# Altium PCB radioslave.PcbDoc
Units mm, origin at the board's own origin, x right, y up, seen from the top; angles counter-clockwise.
Board outline 45 x 100 mm, 2 copper layers (Top Layer, Bottom Layer); 45 components, 40 nets, 153 pads, 25 vias.
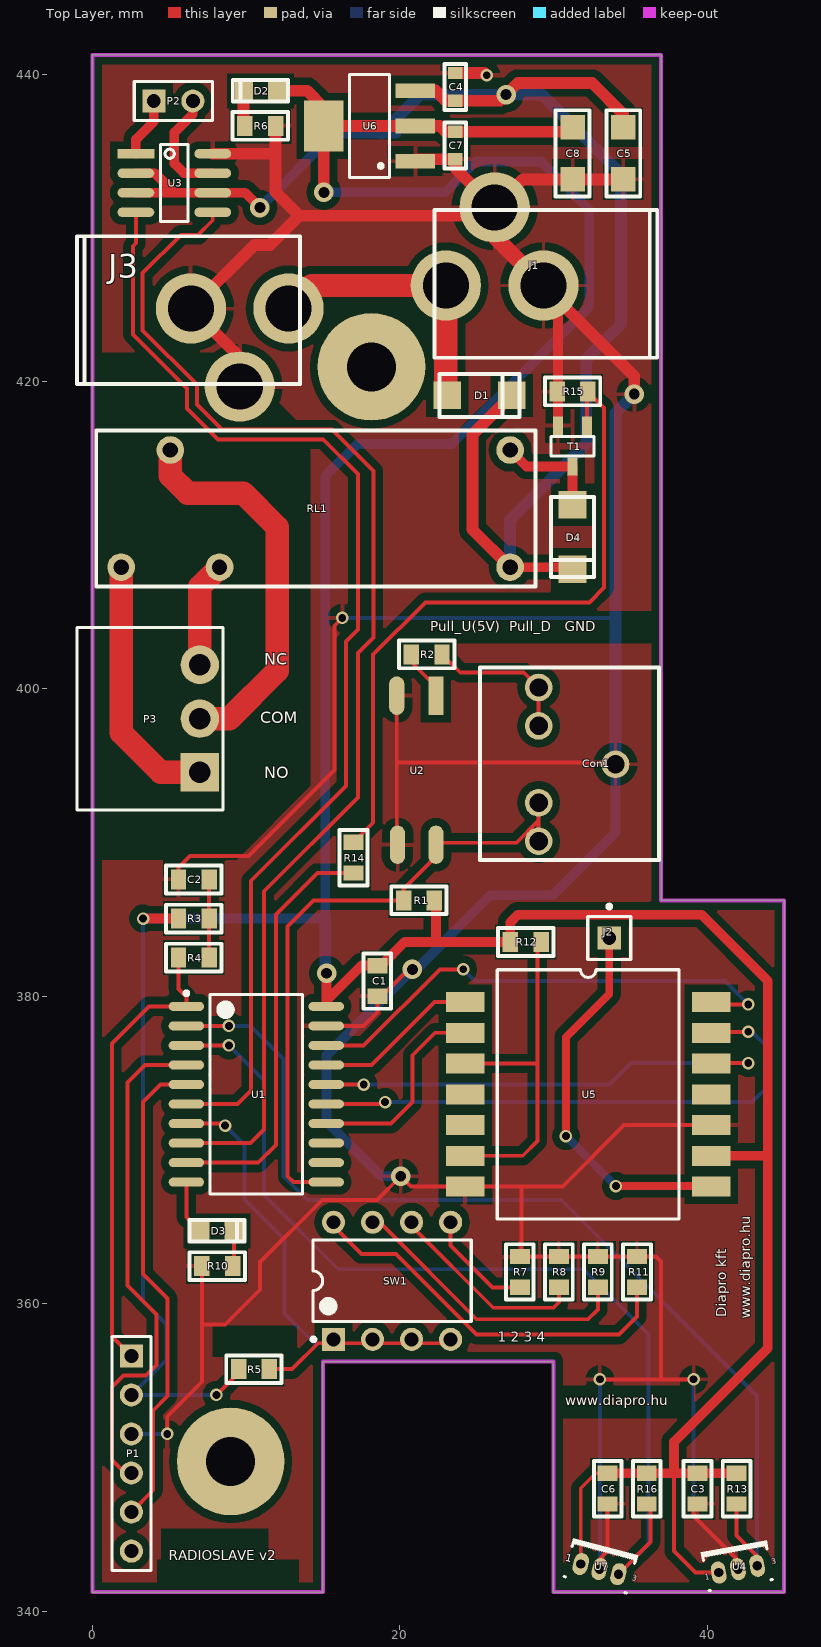
[diagram p0: Top Layer view]
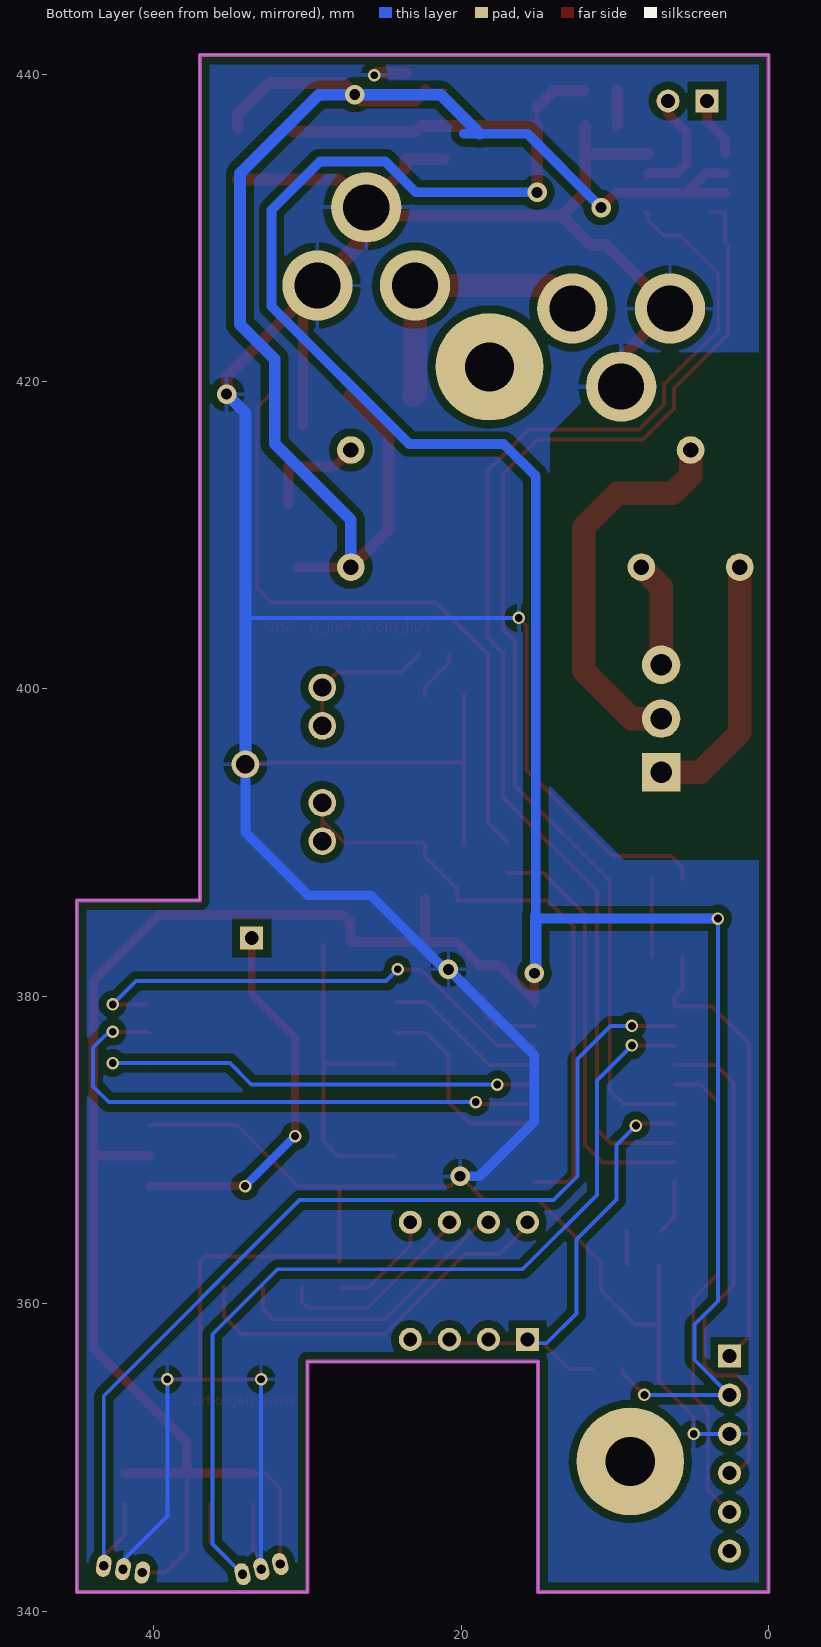
[diagram p1: Bottom Layer view, seen from below]
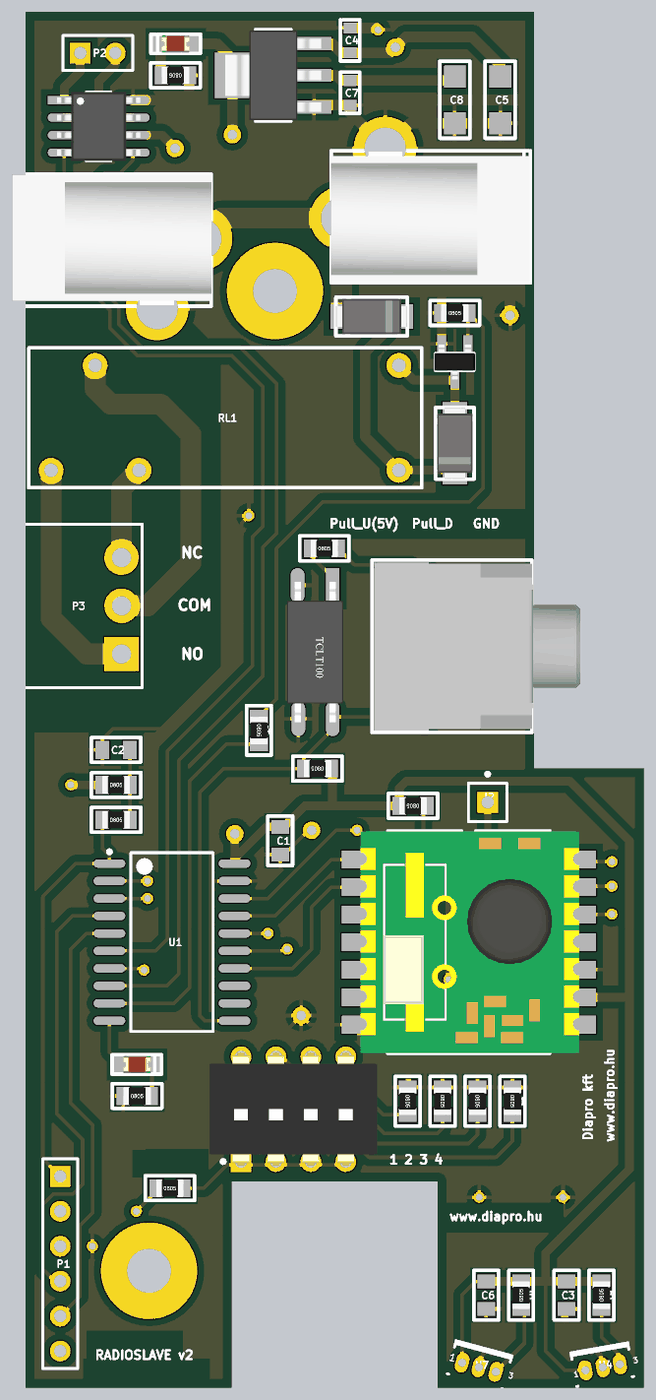
[diagram p2: 3D render of the assembled board from above, using the file's embedded part models]

## Layer stack, top to bottom
Top Layer: signal copper 0.0356
Dielectric: dielectric 0.32, FR-4, Dk 4.8
Bottom Layer: signal copper 0.0356

## Board outline
0,341.249 0,441.249 37,441.249 37,386.249 45,386.249 45,341.249 30,341.249 30,356.249 15,356.249 15,341.249

## Design rules (kind name [scope] priority, off if disabled: settings)
Clearance Clearance_to_polygon [All vs (InNamedPolygon('Bottom GND'))  or (InNamedPolygon('Top GND'))] p1: gap=0.508
Clearance [All] p2: gap=0.381
PolygonConnect [All] p1: connectstyle=Relief reliefconductorwidth=0.254 reliefentries=4 polygonreliefangle="90 Angle"
RoutingVias [All] p1: holewidth=0.508 width=0.813 viastyle="Through Hole" minholewidth=0.508 minwidth=0.813 maxholewidth=0.711 maxwidth=1.27
SilkToSilkClearance [All] p1: silktosilkclearance=0
SilkscreenOverComponentPads [All] p1: minsilkscreentomaskgap=0
SolderMaskExpansion [All] p1: expansion=0.102
Width [All] p1: maxlimit=1.524 minlimit=0.254 preferedwidth=0.254
26 further rules are at their usual default settings.

## Components (designator, comment, footprint, x,y, rotation, side; value= is the part's Value field where it differs from the comment)
C1 "100nF" FP_0805_CAP_060 18.542,381 r90 top
C2 "100nF" FP_0805_CAP_060 6.604,387.604 r0 top
C3 "100nF" FP_0805_CAP_060 39.37,347.98 r90 top
C4 "100nF" FP_0603_CAP_080 23.622,439.166 r270 top
C5 "10uF" FP_1206_CAP_085 34.544,434.848 r270 top
C6 "100nF" FP_0805_CAP_060 33.528,347.98 r90 top
C7 "100nF" FP_0603_CAP_080 23.622,435.356 r270 top
C8 "10uF" FP_1206_CAP_085 31.242,434.848 r90 top
Con1 "Stereo_Jack" STEREO_JACK 34.036,395.097 r180 top
D1 "DIODE_big" "FP_SMA DO214AC" 23.089,419.1 r0 top
D2 "LED_RED" FP_0805_LED_RED 11.938,438.912 r180 top
D3 "LED_GREEN" FP_0805_LED_RED 7.112,364.744 r0 top
D4 "DIODE_big" "FP_SMA DO214AC" 31.242,411.988 r270 top
J1 "2.xmm" FP_DC_TAP_ANYA 23,426.249 r270 top
J2 "ANT" PIN1 33.63,383.794 r0 top
J3 "2.xmm" FP_DC_TAP_ANYA 12.767,424.75 r90 top
P1 "Header 6" HDR1X6 2.54,356.616 r270 top
P2 "Header 2" HDR1X2 4,438.249 r0 top
P3 "Header 3" "SORKAPOCS 3 P RM3.81" 6.997,401.574 r270 top
R1 "10k" FP_0805_RES 21.25,386.249 r180 top
R2 "470R" FP_0805_RES 21.75,402.249 r0 top
R3 "10K" FP_0805_RES 6.604,385.064 r0 top
R4 "100R" FP_0805_RES 6.604,382.524 r0 top
R5 "10k" FP_0805_RES 10.516,355.752 r0 top
R6 "270R" FP_0805_RES 10.922,436.626 r180 top
R7 "10k" FP_0805_RES 27.813,362.077 r270 top
R8 "10k" FP_0805_RES 30.353,362.077 r270 top
R9 "10k" FP_0805_RES 32.893,362.077 r270 top
R10 "270R" FP_0805_RES 8.128,362.458 r0 top
R11 "10k" FP_0805_RES 35.433,362.077 r270 top
R12 "10k" FP_0805_RES 28.194,383.54 r180 top
R13 "820R" FP_0805_RES 41.91,347.98 r90 top
R14 "470R" FP_0805_RES 16.993,389.026 r270 top
R15 "10k" FP_0805_RES 31.242,419.354 r0 top
R16 "820R" FP_0805_RES 36.068,347.98 r90 top
RL1 "S7001E12W" RELAY_MORSE 27.178,415.544 r180 top
SW1 "DIPSW4" "DIP switch 4 TH" 19.5,361.499 r90 top
T1 "Si2306" FET_SOT23 31.242,415.798 r90 top
U1 "PIC24F16KA101-I/SO" SOIC-SO20_N 10.668,373.634 r0 top
U2 "KB817D-B" SOP-4L 21.082,394.716 r270 top
U3 "BD6221" DIGITAL_SOIC8 5.334,432.918 r0 top
U4 "A3122EUA" "Allegro_hall sensor" 42,342.741 r10 top
U5 "RFM12B" RFM12B-S1 32.258,373.634 r0 top
U6 "LD1117xx" SUPPLY_SOT223 18.034,436.626 r180 top
U7 "A3122EUA" "Allegro_hall sensor" 33,342.741 r345 top

## Footprints (in the part's own frame and the unit in brackets; to place one, negate y for a bottom-side part, rotate by r counter-clockwise, add the part's x,y. Pads: shape width x height; smd on the part's side, far side on the other; paste and mask are expansions set on the pad)
"Allegro_hall sensor" [mm] "SIP; 3 Leads; Body 3 x 4 x 1.5 mm (typ); Pitch 1.27 mm"
  oval 0.95x1.45 hole 0.6: 1(-1.27,0) 2(0,0) 3(1.27,0)
  silkscreen extent -2.2,-1.05 2.2,1.53
DIGITAL_SOIC8 [mm]
  rect 2.4x0.6 smd: 1(-2.5,1.905)
  oval 2.4x0.6 smd: 2(-2.5,0.635) 3(-2.5,-0.635) 4(-2.5,-1.905) 5(2.5,-1.905) 6(2.5,-0.635) 7(2.5,0.635) 8(2.5,1.905)
  silkscreen extent -0.9,-2.5 0.9,2.5, body extent -3.03,-2.5 3.03,2.5, height 1.9
"DIP switch 4 TH" [mm]
  rect 1.5x1.5 hole 0.9: 1(-3.81,3.81)
  round 1.5 hole 0.9: 2(-3.81,1.27) 3(-3.81,-1.27) 4(-3.81,-3.81) 5(3.81,-3.81) 6(3.81,-1.27) 7(3.81,1.27) 8(3.81,3.81)
  silkscreen extent -3.93,-5.15 2.65,5.23, body extent -4.1,-6.1 4.1,6.1, height 5
FET_SOT23 [mm] "SOT23-3 tok"
  rect 1.2x0.65 smd: D(-1.327,0) G(1.327,-0.95) S(1.327,0.95)
  silkscreen extent -0.64,-1.4 0.64,1.4, body extent -1.27,-1.46 1.27,1.46, height 0.97
FP_0603_CAP_080 [mm] "0.8mm magas 0603 kapacitás"
  rect 0.8x0.95 smd: 1(-0.9,0) 2(0.9,0)
  silkscreen extent -1.5,-0.7 1.5,0.7, body extent -0.8,-0.4 0.76,0.4, height 0.8
FP_0805_CAP_060 [mm] "0805 kapacitás YAGEO 0.6 mm magas"
  rect 1x1.3 smd: 1(-1,0) 2(1,0)
  silkscreen extent -1.8,-0.9 1.8,0.9, body extent -1,-0.64 1.03,0.64, height 0.6
FP_0805_LED_RED [mm] "0805 méretû piros LED"
  rect 1.2x1.3 smd: A(-0.1,0) K(2.1,0)
  silkscreen extent -0.8,-0.7 2.8,0.7, body extent 0.01,-0.63 2.03,0.62, height 1.1
FP_0805_RES [mm] "0805 ellenállás"
  rect 1x1.3 smd: 1(-1,0) 2(1,0)
  silkscreen extent -1.8,-0.9 1.8,0.9, body extent -1,-0.62 1,0.63, height 0.62
FP_1206_CAP_085 [mm] "1206 kapacitás 0.85 mm"
  rect 1.6x1.6 smd: 1(-1.7,0) 2(1.7,0)
  silkscreen extent -2.8,-1.1 2.8,1.1, body extent -1.52,-0.79 1.58,0.79, height 0.85
FP_DC_TAP_ANYA [mil] "DC HEBA25 TÁPFESZÜLTSÉG ALJZAT ZÁRT, NYÁKBA 90°"
  round 180 hole 118: 1(0,0) 2(0,250) 3(-200,125)
  silkscreen extent -193,-30 185,541, body extent -190,-31 183,539, height 440
"FP_SMA DO214AC" [mm] "SMA DO-214AC tok"
  rect 1.8x1.8 smd: A(0,0) K(4.2,0)
  silkscreen extent -0.5,-1.4 4.7,1.4, body extent -0.5,-1.3 4.7,1.3, height 2.42
HDR1X2 [mm] "Connector; Header; 2 Position"
  rect 1.5x1.5 hole 0.9: 1(0,0)
  round 1.5 hole 0.9: 2(2.54,0)
  silkscreen extent -1.27,-1.27 3.81,1.27
HDR1X6 [mm] "Connector; Header; 6 Position"
  rect 1.5x1.5 hole 0.9: 1(0,0)
  round 1.5 hole 0.9: 2(2.54,0) 3(5.08,0) 4(7.62,0) 5(10.16,0) 6(12.7,0)
  silkscreen extent -1.27,-1.27 13.97,1.27
PIN1 [mm] "Connector; Plug"
  rect 1.5x1.5 hole 0.9: 1(0,0)
  silkscreen extent -1.4,-1.4 1.4,2.17
RELAY_MORSE [mm]
  round 1.8 hole 1: 1(0,7.62) 2(0,0) 3(18.9,7.62) 4(22.1,0) 5(25.3,7.62)
  silkscreen extent -1.65,-1.27 26.92,8.89, body extent -1.65,-1.27 26.92,8.89, height 12.5
RFM12B-S1 [mm]
  rect 2.5x1.3 smd: 1(-8,6) 2(-8,4) 3(-8,2) 4(-8,0) 5(-8,-2) 6(-8,-4) 7(-8,-6) 8(8,-6) 9(8,-4) 10(8,-2) 11(8,0) 12(8,2) 13(8,4) 14(8,6)
  silkscreen extent -5.91,-8.1 5.92,8.1, body extent -7.88,-8.05 8.04,8.05, height 2.1
SOIC-SO20_N [mm] "SOIC, 20-Leads, Body 12.8x7.5mm, Pitch 1.27mm, IPC Medium Density"
  oval 2.3x0.6 smd: 1(-4.55,5.715) 2(-4.55,4.445) 3(-4.55,3.175) 4(-4.55,1.905) 5(-4.55,0.635) 6(-4.55,-0.635) 7(-4.55,-1.905) 8(-4.55,-3.175) 9(-4.55,-4.445) 10(-4.55,-5.715) 11(4.55,-5.715) 12(4.55,-4.445) 13(4.55,-3.175) 14(4.55,-1.905) 15(4.55,-0.635) 16(4.55,0.635) 17(4.55,1.905) 18(4.55,3.175) 19(4.55,4.445) 20(4.55,5.715)
  silkscreen extent -4.67,-6.5 3,6.69, body extent -3.75,-6.5 3.75,6.5, height 2.65
SOP-4L [mm]
  rect 2.5x1 smd: 1(-4.85,1.275)
  oval 2.5x1 smd: 2(-4.85,-1.275) 3(4.85,-1.225) 4(4.85,1.275)
  body extent -5.1,-2.05 5.1,2.05, height 2.1
"SORKAPOCS 3 P RM3.81" [mm] "SORKAPOCS 3 P RM3.81 CSAPSORLÉC TLPHC100V-03P (TLM) ZÁRT 8A 150V VDE [43-22-68]"
  rect 2.5x2.5 hole 1.4: 1(7,0)
  round 2.5 hole 1.4 mask+0.102: 2(3.5,0) 3(0,0)
  silkscreen extent -2.44,-8 9.45,1.5, body extent -2.41,-8 9.45,1.5, height 7.2
STEREO_JACK [mm] "JACK 3.5mm ANYA 90° JS35-09 (T-T) LEVÁL. NYÁK SZTEREO 90° A-V [43-08-39]"
  round 1.8 hole 1.2: 1(0,0) 2(5,5) 2(5,2.5) 3(5,-2.5) 3(5,-5)
  silkscreen extent -2.82,-6.3 8.81,6.22, body extent -6.33,-6.13 8.67,6.07, height 11.5
SUPPLY_SOT223 [mm] "SOT223 package, 3 leads"
  rect 2.55x0.95 smd: 1(-2.975,2.3) 2(-2.975,0) 3(-2.975,-2.3)
  rect 2.55x3.3 smd: 2(2.975,0)
  silkscreen extent -1.3,-3.35 1.3,3.35, body extent -3.5,-3.25 3.5,3.25, height 1.65

## Part data
C1 C2 C3 C4 C5 C6 C7 C8: library part Cap, "Capacitor"
D2: library part LED_R, "Typical LED"
D3: library part LED_G, "Typical LED"
J1 J3: library part DC_TAP_ANYA, "2.xmm DC HEBA25 TÁPFESZÜLTSÉG ALJZAT ZÁRT, NYÁKBA 90°"
J2: library part Socket, "Socket"
P1: "Header, 6-Pin"
P2: "Header, 2-Pin"
P3: "Header, 3-Pin"
R1 R2 R3 R4 R5 R6 R7 R8 R9 R10 R11 R12 R13 R14 R15 R16: library part Res3, "Resistor"
RL1: library part RELAY_MORSE, "S7001E12W  12V morse 230AC/10A"
T1: library part NMOS
U1: "16-Bit Flash Microcontroller with nanoWatt XLP Technology, 16KB Flash, 1.5KB SRAM, 20-Pin SOIC, Industrial Temperature"
U2: "KB817D-B (KIN) SOP-4L OPTOCOUPLER TRANS-OUT 300-600% 5kV SOP-4L [84-00-48]"
U3: "H_bridge"
U4 U7: "Hall-Effect Switch for High-Temperature Operation"
U5: "FM Module"
U6: "LD1117xx 3,3V lin reg"

## Free pads (board coordinates)
  round 7 hole 3.2: 0(9,349.749) 0(18.161,420.954)

## Via types
v1: diameter 0.813, hole 0.508, Top Layer to Bottom Layer, 18 vias
v2: diameter 1.27, hole 0.711, Top Layer to Bottom Layer, 7 vias

## Nets (pads, with @x,y where several pads share a name; then routed paths per layer and width w, separated by ;. In a path a pad name is that pad's centre, name@x,y a point inside that pad or via, vN(x,y) a via of type N, cw(c..) or ccw(c..) an arc to the next point about the centre after c; other vN are vias at no path point)
AN0: R13.1 U1.2 U4.3 | length 67.2
  Top Layer w0.254: U1.2 v1(8.89,378.079) ; R13.1 41.91,344.932 43.251,343.591 U4.3
  Bottom Layer w0.254: v1(8.89,378.079) 10.287,378.079 12.446,375.92 12.446,368.3 13.997,366.749 30.507,366.749 43.251,354.005 U4.3
AN1: R16.1 U1.3 U7.3 | length 64.1
  Top Layer w0.254: U1.3 v1(8.89,376.809) ; U7.3 36.322,344.508 R16.1@36.322,346.98
  Bottom Layer w0.254: v1(8.89,376.809) 11.176,374.523 11.176,367.073 16,362.249 31.959,362.249 36.186,358.022 36.186,344.372 U7.3
AN2: R5.2 SW1.1 SW1.2 SW1.3 SW1.4 U1.7 | length 33.1
  Top Layer w0.254: U1.7 8.509,371.729 v1(8.636,371.602) ; R5.2 13.003,355.752 14.69,357.439 SW1.4@23.56,357.439
  Bottom Layer w0.254: v1(8.636,371.602) 9.906,370.332 9.906,366.776 12.5,364.182 12.5,359.379 14.44,357.439 SW1.1@15.69,357.439
AN2/PGD1: P1.4 U1.4 | length 33.3
  Top Layer w0.254: P1.4 2.134,348.996 1.282,349.848 1.282,354.597 2.019,355.334 3.476,355.334 4.166,356.023 4.166,359.308 2.286,361.188 2.286,374.396 3.429,375.539 U1.4
GND: C1.1 C2.1 C3.1 C4.1 C5.2 C6.1 C7.2 C8.1 Con1.1 J1.2 J1.3 J3.2 J3.3 P1.3 R6.1 R7.1 R8.1 R9.1 R10.1 R11.1 R15.1 T1.S U1.19 U2.2 U2.3 U3.8 U4.2 U5.7 U5.10 U6.1 U7.2 | length 339.1
  Top Layer w0.254: v1(4.877,351.536) 4.877,352.679 7.128,354.93 R10.1 ; C2.1 5.604,388.382 6.35,389.128 10.16,389.128 15.748,394.716 15.748,404.114 v1(16.256,404.622) ; 7.229,358.648 8.649,358.648 10.922,360.921 10.922,362.712 14.959,366.749 18.515,366.749 v2(20.066,368.3) 20.732,367.634 U5.7 30.601,367.634 34.601,371.634 U5.10 ; U1.19 17.653,378.079 18.542,378.968 C1.1 18.812,380 20.828,382.016 v2@20.828,382.27 ; U2.3@19.807,389.866 19.807,395.229 ; U2.2 19.807,395.229 ; v1@25.516,440.066 v1(25.654,439.928) ; J1.3@25.63,430.784 J1.3 J1.3@26.175,429.424 ; R7.1 R7.1@27.924,363.077 ; R7.1@27.924,362.712 R7.1@27.924,363.077 ; 27.924,367.618 R7.1@27.924,363.077 ; J1.2 J1.2@29.514,426.085 ; U7.2 33,343.388 33.528,343.916 C6.1 ; v1(33.02,355.092) 37,355.092 ; Con1.1 33.904,395.229 19.807,395.229 ; C3.1@39.116,346.98 39.116,346.202 42,343.318 U4.2 ; v1(39.116,355.092) 37,355.092 ; R7.1@27.924,363.077 R8.1 R9.1 R11.1 36.672,363.077 37,362.749 37,355.092
  Top Layer w0.635: T1.S J1.2@30.292,425.307
  Top Layer w0.762: U3.8 11.82,434.823 11.922,434.721 ; J3.3 9.592,421.575 J3.2 10.546,428.879 11.557,428.879 13.462,430.784 ; R6.1 11.922,434.721 ; U6.1@21.139,434.456 C7.2 23.622,433.882 J1.3 27.994,433.148 C5.2 ; C4.1 v1@25.516,440.066 ; J1.3@25.63,430.784 13.462,430.784 ; J1.2@29.514,426.085 30.292,425.307 35.255,420.344 v2(35.255,419.176) ; 11.922,434.721 11.922,432.324 13.462,430.784
  Top Layer w1.016: J1.3@26.175,429.424 J1.2
  Bottom Layer w0.254: P1.3 v1(4.877,351.536) ; v1(16.256,404.622) 33.833,404.622 ; v2@20.574,381.508 v2@20.828,381.508 ; J1.2@29.35,424.32 J1.2 ; U7.2 33,343.388 33.02,343.408 v1(33.02,355.092) ; v1(39.116,355.092) 39.116,346.202 42,343.318 U4.2
  Bottom Layer w0.635: v2(20.066,368.3) 18.796,368.3 15.24,371.856 15.24,376.174 v2@20.574,381.508 ; v2@20.828,381.508 25.908,386.588 29.972,386.588 34.036,390.652 Con1.1
  Bottom Layer w0.762: Con1.1 34.036,417.957 v2(35.255,419.176)
  other v2: 20.828,381.762
GPIO0: Con1.2 R1.2 U1.11 U2.4 | length 41.4
  Top Layer w0.254: U1.11 13.081,367.919 12.7,368.3 12.7,384.556 14.393,386.249 R1.2 20.25,386.999 22.357,389.106 U2.4 ; U2.4@22.357,389.999 27.592,389.999 29.036,391.443 Con1.2@29.036,392.597 ; Con1.2@29.036,390.097 29.036,391.347
GPIO1: R14.2 U1.9 | length 27.5
  Top Layer w0.254: U1.9 10.795,369.189 11.938,370.332 11.938,385.318 14.646,388.026 R14.2
GPIO2: D3.A U1.10 | length 3.5
  Top Layer w0.254: U1.10 6.118,365.638 D3.A
GPIO3: U1.6 U3.4 | length 75.7
  Top Layer w0.254: U3.4@3.81,431.013 U3.4 2.834,428.995 2.642,428.803 2.642,423.062 6.163,419.541 6.163,418.25 8.172,416.241 15.026,416.241 17.272,413.995 17.272,403.86 16.51,403.098 16.51,393.7 10.334,387.524 10.334,373.888 9.445,372.999 U1.6
GPIO4/PGC1: P1.5 U1.5 | length 31.6
  Top Layer w0.254: P1.5 3.962,347.878 3.962,353.06 4.902,354 4.902,360.35 3.302,361.95 3.302,373.126 4.445,374.269 U1.5
GPIO5: U1.8 U3.5 | length 81.2
  Top Layer w0.254: U1.8 10.287,370.459 11.176,371.348 11.176,386.842 17.272,392.938 17.272,402.336 18.288,403.352 18.288,414.172 15.584,416.876 8.435,416.876 6.798,418.513 6.798,419.804 3.277,423.325 3.277,427.05 5.766,429.539 6.883,429.539 7.834,430.49 U3.5 U3.5@8.077,431.013
IN: D1.A J1.1 J3.1 | length 18
  Top Layer w1.524: J3.1 14.266,426.249 J1.1 23,419.189 D1.A
M\C\L\R\: P1.1 R4.1 U1.1 | length 30.1
  Top Layer w0.254: P1.1 1.27,357.886 1.27,376.936 3.683,379.349 U1.1 6.118,379.962 5.604,380.476 R4.1
MISO: U1.17 U5.1 | length 10.7
  Top Layer w0.254: U1.17 18.161,375.539 22.256,379.634 U5.1
MOSI: U1.16 U5.12 | length 30.5
  Top Layer w0.254: U1.16 v1(17.653,374.269) ; U5.12 40.29,375.666 v1(42.672,375.666)
  Bottom Layer w0.254: v1(17.653,374.269) 33.655,374.269 35.052,375.666 v1(42.672,375.666)
NetC2_2: C2.2 R3.2 R4.2 | length 5.1
  Top Layer w0.254: R4.2 R3.2 C2.2
NetCon1_3: Con1.3 R2.2 | length 9.7
  Top Layer w0.254: R2.2 23.933,401.066 28.067,401.066 29.036,400.097 Con1.3@29.036,397.597
NetD2_K: D2.K R6.2 | length 2.2
  Top Layer w0.762: R6.2@9.838,436.71 D2.K
NetD3_K: D3.K R10.2 | length 2.2
  Top Layer w0.254: R10.2@9.212,362.542 D3.K
NetD4_A: D4.A RL1.2 T1.D | length 7
  Top Layer w0.635: RL1.2 28.251,414.471 T1.D D4.A
NetJ2_1: J2.1 U5.8 | length 24.9
  Top Layer w0.508: v1(30.81,370.916) 30.81,377.342 33.63,380.162 J2.1 ; v1(34.061,367.665) 40.227,367.665 U5.8
  Bottom Layer w0.508: v1(30.81,370.916) v1(34.061,367.665)
NetP2_1: P2.1 U3.1 | length 3.9
  Top Layer w0.635: U3.1 2.834,435.752 4,436.918 P2.1
NetP2_2: P2.2 U3.7 | length 7.3
  Top Layer w0.635: 5.334,436.22 5.334,434.188 5.969,433.553 U3.7 ; 5.347,436.207 6.54,437.4 P2.2
NetP3_1: P3.1 RL1.5 | length 17
  Top Layer w1.524: RL1.5@1.878,407.999 1.878,397.156 4.46,394.574 P3.1
NetP3_2: P3.2 RL1.4 | length 25.7
  Top Layer w1.524: RL1.4 5.078,413.87 6.223,412.725 9.83,412.725 12.04,410.515 12.04,401.193 8.921,398.074 P3.2
NetP3_3: P3.3 RL1.3 | length 6.9
  Top Layer w1.524: P3.3 6.997,406.643 RL1.3
NetR2_1: R2.1 U2.1 | length 3.3
  Top Layer w0.254: R2.1 20.75,401.749 22.357,400.142 U2.1
NetR7_2: R7.2 SW1.5 | length 6.9
  Top Layer w0.254: SW1.5@23.31,365.059 23.31,363.809 26.042,361.077 R7.2
NetR8_2: R8.2 SW1.6 | length 12.9
  Top Layer w0.254: SW1.6@20.77,365.059 26.08,359.749 30,359.749 30.353,360.102 R8.2
NetR9_2: R9.2 SW1.7 | length 18.9
  Top Layer w0.254: SW1.7@18.23,365.059 18.94,365.059 25,358.999 32.25,358.999 32.893,359.642 R9.2
NetR11_2: R11.2 SW1.8 | length 25.1
  Top Layer w0.254: SW1.8@15.69,365.059 17.5,363.249 19.75,363.249 25,357.999 34.25,357.999 35.433,359.182 R11.2
NetR12_1: R12.1 U5.3 U5.6 | length 22.5
  Top Layer w0.254: U5.6 28.004,369.634 28.956,370.586 R12.1@28.956,383.302 ; U5.3 28.956,375.634
NetR14_1: R14.1 R15.2 T1.G | length 44.9
  Top Layer w0.254: R14.1 18.263,391.296 18.263,402.234 21.666,405.638 32.334,405.638 33.299,406.603 33.299,418.281 R15.2@32.242,419.338 ; T1.G R15.2@32.192,419.304
"RF I\R\Q\": U1.14 U5.2 | length 13.3
  Top Layer w0.254: U1.14 19.431,371.729 20.828,373.126 20.828,376.174 22.288,377.634 U5.2
"RF S\S\": U1.18 U5.14 | length 32.7
  Top Layer w0.254: U1.18 17.653,376.809 22.606,381.762 v1(24.13,381.762) ; U5.14@40.416,379.476 v1(42.672,379.476)
  Bottom Layer w0.254: v1(24.13,381.762) 24.892,381 41.148,381 v1(42.672,379.476)
SCK: U1.15 U5.13 | length 36.1
  Top Layer w0.254: U1.15 19.177,372.999 v1(19.05,373.126) ; U5.13 40.322,377.698 v1@42.926,377.698
  Bottom Layer w0.254: v1(19.05,373.126) 42.926,373.126 43.942,374.142 43.942,376.682 v1@42.926,377.698
  other v1: 42.672,377.698
SCL: U1.12
SDA: U1.13
VCC3.3V: C1.2 C3.2 C6.2 C7.1 C8.2 D2.A P1.2 R1.1 R3.1 R5.1 R12.2 R13.2 R16.2 U1.20 U4.1 U5.9 U6.2 U7.1 | length 261
  Top Layer w0.254: v1(8.077,354.076) 9.516,355.514 R5.1 ; U6.2@15.059,436.626 U6.2@15.059,437.823 ; U1.20 15.24,379.371 15.24,379.73 ; C8.2@30.95,436.256 C8.2 ; U7.1 31.773,348.003 32.75,348.98 C6.2 ; 37.846,348.98 37.846,343.916 39.242,342.52 U4.1 U4.1@40.894,342.376
  Top Layer w0.635: v1(3.302,385.064) R3.1 ; v2(15.24,381.508) 15.24,379.73 17.526,382.016 18.796,382.016 20.32,383.54 22.352,383.54 ; R1.1@22.352,386.35 22.352,383.54 ; C6.2 R16.2 37.846,348.98 ; U5.9 43.878,369.634 ; R13.2 C3.2 37.846,348.98 ; 22.352,383.54 R12.2 27.194,384.826 27.686,385.318 39.624,385.318 43.942,381 43.942,357.124 37.846,351.028 37.846,348.98
  Top Layer w0.762: D2.A 13.97,438.912 U6.2@15.059,437.823 ; v2(15.059,432.308) 15.059,436.626 21.009,436.626 22.606,436.626 22.976,436.256 C7.1 C8.2@30.95,436.256
  Bottom Layer w0.254: v1(3.302,385.064) 3.302,360.172 4.826,358.648 4.826,356.362 P1.2 v1(8.077,354.076) v1@8.382,354.076 ; v2@14.986,432.235 v2(15.059,432.308) ; v2@15.151,381.597 v2(15.24,381.508)
  Bottom Layer w0.635: v1(3.302,385.064) 14.986,385.064 ; v2(15.059,432.308) 22.933,432.308 24.939,434.314 29.186,434.314 32.334,431.165 32.334,424.891 23.38,415.937 17.247,415.937 15.151,413.841 15.151,385.229
  Bottom Layer w0.762: v2@15.151,381.597 15.151,385.229
VCC_13V: C4.2 C5.1 D1.K D4.K RL1.1 U3.2 U3.3 U3.6 U6.3 | length 102.4
  Top Layer w0.254: U6.3 22.338,438.926 ; v2@26.532,438.266 v2(26.924,438.658)
  Top Layer w0.635: U3.3 5.334,432.283 ; U3.2 4.064,433.553 5.334,432.283 ; v2(10.897,431.317) 9.931,432.283 U3.6 5.334,432.283 ; RL1.1 D4.K@30.598,407.924
  Top Layer w0.762: 22.338,438.926 22.998,438.266 C4.2 v2@26.532,438.266 ; v2(26.924,438.658) 27.686,439.42 32.512,439.42 34.544,437.388 C5.1 ; RL1.1 24.727,410.375 24.727,416.538 D1.K
  Bottom Layer w0.635: v2(10.897,431.317) 15.697,436.118 18.796,436.118 19.812,436.118
  Bottom Layer w0.762: 18.796,436.118 21.336,438.658 v2(26.924,438.658) 29.261,438.658 34.392,433.527 34.392,423.723 32.131,421.462 32.131,415.95 27.178,410.997 RL1.1
pads on no net: P1.6 U5.4 U5.5 U5.11

## Polygon pours and split planes (outlines as drawn)
GND on Top Layer "Top GND" (solid, pour order 4): 37,441.249 37,386.249 45,386.249 45,341.249 30,341.249 30,352.171 15,352.171 15,341.249 0,341.249 0,441.249
GND on Bottom Layer "Bottom GND" (solid, pour order 5): 37,441.249 37,386.249 45,386.249 45,341.249 30,341.249 30,352.171 15,352.171 15,341.249 0,341.249 0,441.249

## Keep-outs
Keep-Out Layer:
  lines w0.254: 0,341.249 0,441.249 15.881,441.249 37,441.249 37,389.249 37,386.249 39.185,386.249 45,386.249 45,341.249 30,341.249 30,356.249 15,356.249 15,341.249 0,341.249

## Other copper
Top Layer:
  pour cut-out: 15.375,356.249 29.625,356.249 29.625,354.249 29.75,351.749 27.53,351.463 15.496,351.878
  pour cut-out: 0,421.894 8.89,421.894 14.224,416.56 14.224,393.7 9.398,388.874 0,388.874
  text "Pull_U(5V)  Pull_D   GND" at 22,403.749 h0.64
  text "www.diapro.hu" at 30.77,353.406 h0.64
Bottom Layer:
  pour cut-out: 15.25,356.249 15.5,351.749 29.25,351.749 29.5,351.499 29.75,351.749 30,356.249
  pour cut-out: 0,421.894 8.89,421.894 14.224,416.56 14.224,393.7 9.398,388.874 0,388.874

## Silkscreen, mask and mechanical layers (free items; w line width, h text height)
Top Overlay:
  text "Pull_U(5V)  Pull_D   GND" at 22,403.749 h0.64
  text "NC" at 11.176,401.574 h0.76
  text "COM" at 10.922,397.764 h0.76
  text "NO" at 11.176,394.208 h0.76
  text "Diapro kft" at 41.224,359.131 h0.64 r90
  text "www.diapro.hu" at 42.799,359.029 h0.64 r90
  text "1 2 3 4" at 26.365,357.53 h0.64
  text "www.diapro.hu" at 30.77,353.406 h0.64
  text "RADIOSLAVE v2" at 4.978,343.332 h0.64

## Text inside footprints (layer, text, board x,y; h text height)
U4: Top Overlay "3" at 44.196,343.027 h0.38 r10; Top Overlay "1" at 39.878,342.011 h0.38 r10
U7: Top Overlay "3" at 35.052,342.011 h0.38 r345; Top Overlay "1" at 30.734,343.281 h0.51 r345